# Altium PCB ST_Link-Wiki.PcbDoc
Units mm, origin at the board's own origin, x right, y up, seen from the top; angles counter-clockwise.
Board outline 32.77 x 33.27 mm, 2 copper layers (Top Layer, Bottom Layer), stack 1.571 mm thick; 49 components, 46 nets, 176 pads, 43 vias.
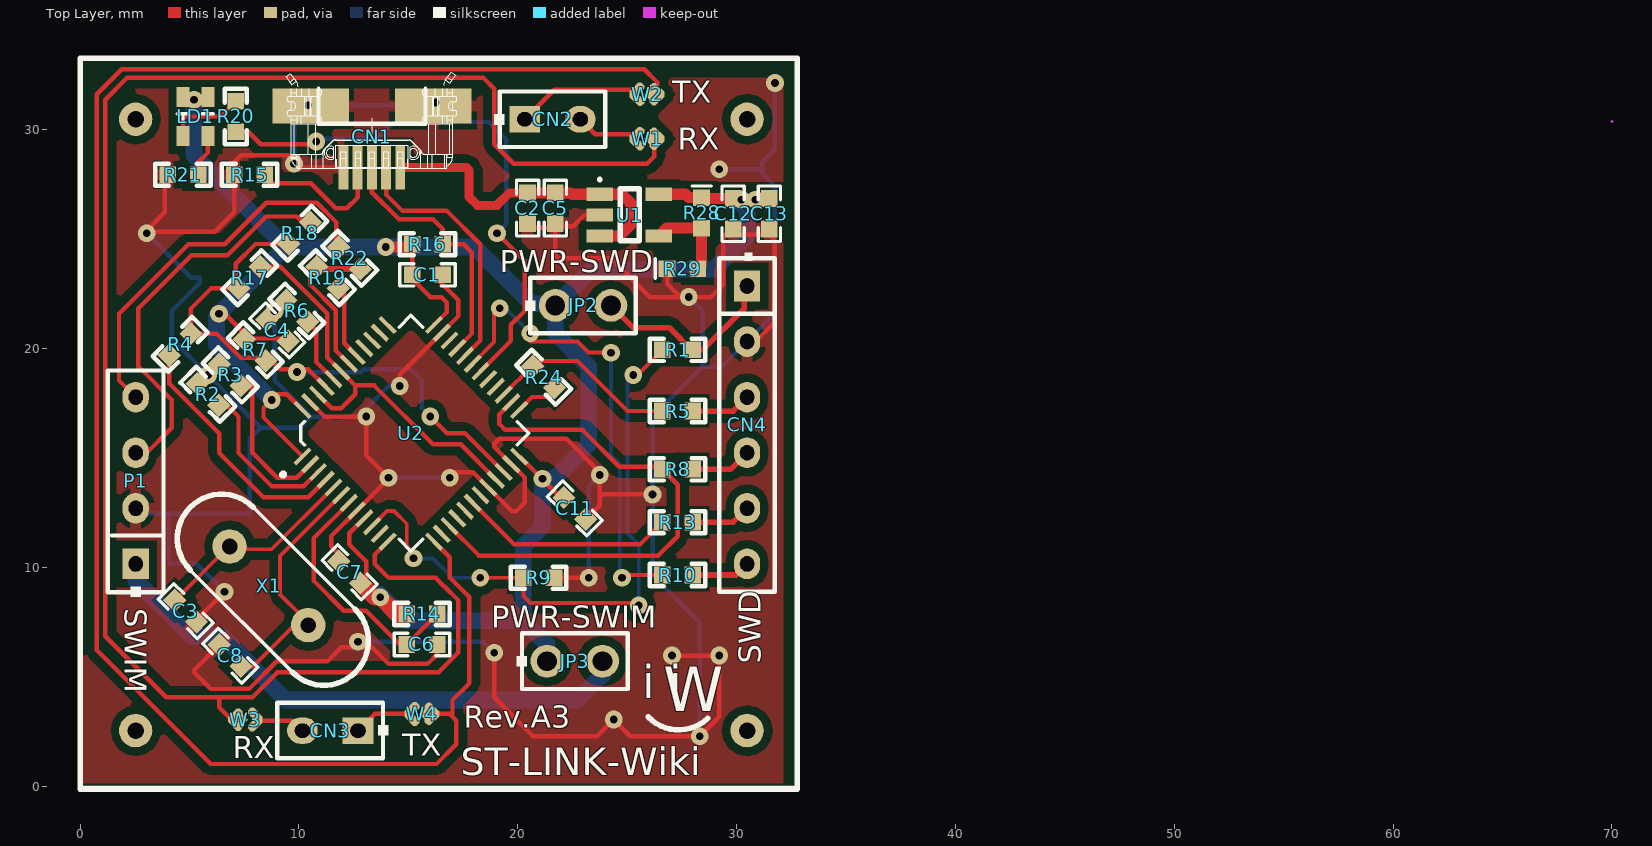
[diagram p0: Top Layer view]
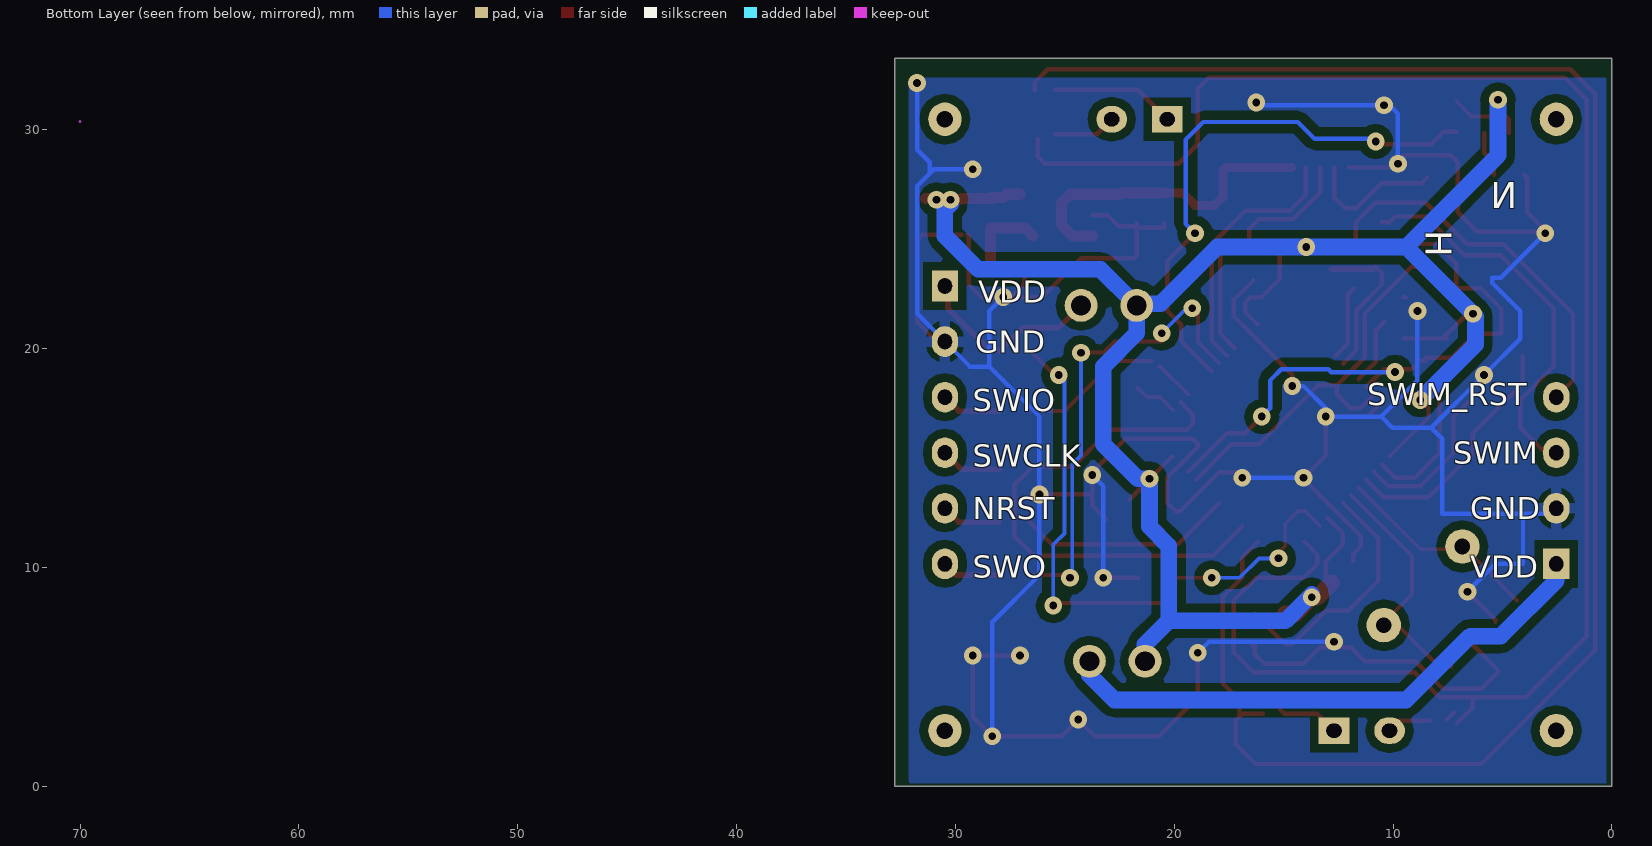
[diagram p1: Bottom Layer view, seen from below]

## Layer stack, top to bottom
Top Solder: solder mask 0.0102, Solder Resist, Dk 3.5
Top Layer: signal copper 0.0356
Dielectric1: core 1.5, FR-4, Dk 4.8
Bottom Layer: signal copper 0.0356
Bottom Solder: solder mask 0.0102, Solder Resist, Dk 3.5

## Board outline
0,33.274 0,0 32.766,0 32.766,33.274

## Design rules (kind name [scope] priority, off if disabled: settings)
Clearance Clearance_1 [(InPoly)] p1: gap=0.381
Clearance [All] p2: gap=0.178
FabricationTestPointUsage TestPointUsage [All] p1: valid=0 allowmultiple=FALSE
FabricationTestpoint Testpoint [(IsPad And (OnTopLayer Or OnBottomLayer))] p1: side=3 testpointundercomponent=TRUE minsize=1.016 maxsize=2.54 preferedsize=1.524 minholesize=0 maxholesize=1.016 preferedholesize=0.813 testpointgrid=0.025 allowsidetop=TRUE allowsidebottom=TRUE usegrid=TRUE gridtolerance=0
HoleSize [All] p1: absolutevalues=TRUE maxlimit=3.81 minlimit=0.025 maxpercent=80.000 minpercent=20.000
PolygonConnect PolygonConnect_1 [IsVia] p1: connectstyle=Direct reliefconductorwidth=0.508 reliefentries=4 polygonreliefangle="90 Angle" airgapwidth=0.254
PolygonConnect [All] p2: connectstyle=Relief reliefconductorwidth=0.508 reliefentries=4 polygonreliefangle="90 Angle" airgapwidth=0.254
RoomDefinition ST_LINK-Wiki [InComponentClass('ST_LINK-Wiki')] p1: confinementstyle=ConfineIn formatcopy=TRUE lockcomponents=FALSE outline -0.254,-0.127 32.766,-0.127 32.766,33.274 -0.254,33.274
RoutingLayers [All] p1: top layer_v5=FALSE bottom layer_v5=FALSE
RoutingVias [All] p1: holewidth=0.33 width=0.635 viastyle="Through Hole" minholewidth=0.203 minwidth=0.406 maxholewidth=0.711 maxwidth=1.27
SilkToSolderMaskClearance SilkscreenOverComponentPads [IsPad] p1: minsilkscreentomaskgap=0.254 clearancetoexposedcopper=TRUE
SolderMaskExpansion [All] p1: expansion=0.102
UnpouredPolygon [All] p1: allowunpoured=FALSE
Width Width_1 [InNet('VDD_MCU')] p1: maxlimit=2.54 minlimit=0.152 preferedwidth=0.305
Width [All] p2: maxlimit=2.54 minlimit=0.178 preferedwidth=0.203 minimp=50.000000 maximp=50.000000 favimp=50.000000
24 further rules are at their usual default settings.

## Components (designator, comment, footprint, x,y, rotation, side; value= is the part's Value field where it differs from the comment)
C1 "100nF" 0603C 15.875,23.368 r0 top (schematic designator C7)
C2 "1uF_X5R_0603" 0603C 20.447,26.416 r270 top (schematic designator C9)
C3 "20pF" 0603C 4.826,8.001 r135 top (schematic designator C2)
C4 "100nF" 0603C 9.017,20.828 r135 top (schematic designator C6)
C5 "100nF" 0603C 21.717,26.416 r270 top (schematic designator C11)
C6 "100nF" 0603C 15.621,6.477 r0 top (schematic designator C4)
C7 "100nF" 0603C 12.319,9.779 r135 top (schematic designator C8)
C8 "20pF" 0603C 6.858,5.969 r315 top (schematic designator C1)
C11 "100nF" 0603C 22.606,12.7 r315 top (schematic designator C5)
C12 "100nF" 0603C 29.845,26.162 r270 top (schematic designator C13)
C13 "1uF_X5R_0603" 0603C 31.496,26.162 r90 top (schematic designator C10)
CN1 "USB-Micro" USB-MICRO-Lite 13.335,30.988 r0 top (schematic designator CN3)
CN2 "" HDR1X2-L/2.54MM 20.32,30.48 r0 top
CN3 "" HDR1X2-L/2.54MM 12.7,2.54 r180 top
CN4 "Header 6X1" HDR1X6-L/2.54MM 30.48,22.86 r270 top (schematic designator CN1)
JP2 "" HDR1X2/2.54mm 21.717,21.971 r0 top
JP3 "" HDR1X2/2.54mm 21.336,5.715 r0 top
LD1 "LTST-C195KGJRKT" 0805-LED-Bi 5.207,29.591 r90 top
P1 "Header 4" HDR1X4-L/2.54MM 2.54,10.16 r90 top
R1 "4.7K" 0603R 27.305,19.939 r180 top (schematic designator R5)
R2 "10K[N/A]" 0603R 5.842,17.907 r135 top (schematic designator R6)
R3 "10K" 0603R 6.858,18.796 r135 top (schematic designator R4)
R4 "NC" 0603R 4.572,20.193 r45 top
R5 "22" 0603R 27.305,17.145 r0 top (schematic designator R8)
R6 "100K" 0603R 9.906,21.717 r135 top (schematic designator R3)
R7 "680" 0603R 8.001,19.939 r315 top
R8 "22" 0603R 27.305,14.478 r0 top (schematic designator R9)
R9 "4.7K" 0603R 20.955,9.525 r180 top (schematic designator R7)
R10 "22" 0603R 27.305,9.652 r0 top
R13 "22" 0603R 27.305,12.065 r0 top (schematic designator R10)
R14 "100K" 0603R 15.621,7.874 r0 top (schematic designator R12)
R15 "100K" 0603R 7.747,27.94 r0 top (schematic designator R26)
R16 "1K5" 0603R 15.875,24.765 r0 top (schematic designator R23)
R17 "220" 0603R 7.747,23.241 r45 top
R18 "220" 0603R 10.033,25.273 r225 top
R19 "220" 0603R 11.303,23.241 r315 top
R20 "100" 0603R 7.112,30.607 r270 top (schematic designator R18)
R21 "100" 0603R 4.699,27.94 r180 top (schematic designator R17)
R22 "220" 0603R 12.319,24.13 r315 top
R24 "100" 0603R 21.184,18.694 r315 top (schematic designator R16)
R28 "NC" 0603M 28.397,26.899 r270 top
R29 "NC" 0603M 26.822,23.647 r0 top
U1 "LDO" SOT23-5 23.749,27.051 r270 top (schematic designator U2)
U2 "STM32F103CBT6" "QFP48 7X7" 15.113,16.129 r315 top (schematic designator U1)
W1 "Jumper2-1" JP2_SMD 25.908,29.591 r0 top
W2 "Jumper2-1" JP2_SMD 25.908,31.623 r0 top
W3 "Jumper2-1" JP2_SMD 7.544,3.048 r180 top
W4 "Jumper2-1" JP2_SMD 15.621,3.302 r0 top
X1 "8MHz(12pF)" XTAL1 10.414,7.366 r135 top

## Footprints (in the part's own frame and the unit in brackets; to place one, negate y for a bottom-side part, rotate by r counter-clockwise, add the part's x,y. Pads: shape width x height; smd on the part's side, far side on the other; paste and mask are expansions set on the pad)
0603C [mil]
  rect 30x30 smd: 1(27.5,0) 2(-27.5,0)
  silkscreen extent -50,-20 50,20
0603M [mil]
  rect 30x30 smd: 1(0,0) 2(55,0)
  silkscreen extent -21,-17 -21,18, body extent -5,-15 60,15, height 43
0603R [mil]
  rect 30x30 smd: 1(27.5,0) 2(-27.5,0)
  silkscreen extent -50,-20 50,20
0805-LED-Bi [mm]
  rect 0.9x0.6 smd: 1(0.127,-0.635) 2(0.127,0.508) 3(1.905,0.508) 4(1.905,-0.635)
  silkscreen extent 0.76,-0.89 1.14,0.76, body extent 0.32,-1.02 1.72,0.9, height 1.1
HDR1X2-L/2.54MM [mm]
  rect 1.4x1.2 hole 0.65 slot 0.7 at 0 deg: 1(0,0)
  oval 1.4x1.2 hole 0.65 slot 0.7 at 0 deg: 2(2.54,0)
  silkscreen extent -1.4,-1.27 3.68,1.27
HDR1X2/2.54mm [mm]
  round 1.5 hole 0.9: 1(0,0) 2(2.54,0)
  silkscreen extent -1.4,-1.27 3.68,1.27
HDR1X4-L/2.54MM [mm]
  rect 1.4x1.2 hole 0.65 slot 0.7 at 0 deg: 1(0,0)
  oval 1.4x1.2 hole 0.65 slot 0.7 at 0 deg: 2(2.54,0) 3(5.08,0) 4(7.62,0)
  silkscreen extent -1.52,-1.27 8.84,1.27
HDR1X6-L/2.54MM [mm] "Connector; Header; 6 Position"
  rect 1.4x1.2 hole 0.65 slot 0.7 at 0 deg: 1(0,0)
  oval 1.4x1.2 hole 0.65 slot 0.7 at 0 deg: 2(2.54,0) 3(5.08,0) 4(7.62,0) 5(10.16,0) 6(12.7,0)
  silkscreen extent -1.52,-1.27 13.97,1.27
JP2_SMD [mil]
  oct 15x30 smd rot 45: 1(-18,-8) 2(18,7)
  oct 15.75x30 smd rot 135: 1(-18,8)
  rect 26x26 smd rot 45: 2(13,0)
  oct 15x30 smd rot 135: 2(18,-7)
"QFP48 7X7" [mm]
  rect 0.2x1 smd: 1(-2.75,-4.25) 2(-2.25,-4.25) 3(-1.75,-4.25) 4(-1.25,-4.25) 5(-0.75,-4.25) 6(-0.25,-4.25) 7(0.25,-4.25) 8(0.75,-4.25) 9(1.25,-4.25) 10(1.75,-4.25) 11(2.25,-4.25) 12(2.75,-4.25) 25(2.75,4.25) 26(2.25,4.25) 27(1.75,4.25) 28(1.25,4.25) 29(0.75,4.25) 30(0.25,4.25) 31(-0.25,4.25) 32(-0.75,4.25) 33(-1.25,4.25) 34(-1.75,4.25) 35(-2.25,4.25) 36(-2.75,4.25)
  rect 1x0.2 smd: 13(4.25,-2.75) 14(4.25,-2.25) 15(4.25,-1.75) 16(4.25,-1.25) 17(4.25,-0.75) 18(4.25,-0.25) 19(4.25,0.25) 20(4.25,0.75) 21(4.25,1.25) 22(4.25,1.75) 23(4.25,2.25) 24(4.25,2.75) 37(-4.25,2.75) 38(-4.25,2.25) 39(-4.25,1.75) 40(-4.25,1.25) 41(-4.25,0.75) 42(-4.25,0.25) 43(-4.25,-0.25) 44(-4.25,-0.75) 45(-4.25,-1.25) 46(-4.25,-1.75) 47(-4.25,-2.25) 48(-4.25,-2.75)
  silkscreen extent -3.81,-5.52 3.81,3.81
SOT23-5 [mm]
  rect 0.6x1.2 smd: 1(0,0) 2(0.95,0) 3(1.9,0) 4(1.9,2.7) 5(0,2.7)
  silkscreen extent -0.69,0 2.13,1.8, body extent -0.32,0.7 2.35,2.1, height 1.1
USB-MICRO-Lite [mm] "Connector; USB2.0, Type B, SM; 5 Position; Right Angle"
  rect 3.5x1.6 smd: 0(-2.802,0.088) 0(2.798,0.088)
  rect 0.45x2 smd: 1(1.298,-2.714) 2(0.648,-2.714) 3(-0.002,-2.714) 4(-0.652,-2.714) 5(-1.302,-2.714)
  silkscreen extent -3.92,-2.74 3.88,1.65
XTAL1 [mil]
  round 62 hole 28: 1(-0.36,-0.2) 2(199.64,-0.2)
  silkscreen extent -120,-80 300,80

## Part data
C1 C3 C4 C5 C6 C7 C8 C11 C12: library part Capacitor_ST, "Capacitor 0402 / 0603 / 0805"
C2 C13: library part "CAP SMD 0603  X5R 1µF 25V 10%", "0603  X5R 1µF"
CN2 CN3 JP2 JP3: library part JP2
CN4: "Header, 6-Pin, Single row"
LD1: "Avago, HSMF-A203 Bi-Color LED"
P1: "Header, 4-Pin"
R1 R2 R3 R4 R5 R6 R7 R8 R9 R10 R13 R14 R15 R16 R17 R18 R19 R20 R21 R22 R24: library part Resistor_ST, "Resistor 0402 / 0603 / 0805"
R28 R29: library part Res2, "Resistor"
U1: library part LDO-SOT23-5, "General LDO SOT23-5"
U2: "Medium-density performance line ARM-based 32-bit MCU with 64KB Flash"
W1 W2 W3 W4: "Jumper Wire"
X1: library part XTAL, "Crystal Oscillator"

## Free pads (board coordinates)
  round 1.524 hole 0.762: 2(2.54,2.54) 2(2.54,30.48) 2(30.48,2.54) 2(30.48,30.48)

## Via types
v1: diameter 0.813, hole 0.356, Top Layer to Bottom Layer, 43 vias

## Nets (pads, with @x,y where several pads share a name; then routed paths per layer and width w, separated by ;. In a path a pad name is that pad's centre, name@x,y a point inside that pad or via, vN(x,y) a via of type N, cw(c..) or ccw(c..) an arc to the next point about the centre after c; other vN are vias at no path point)
+3V3_ST_LINK: C1.2 C4.2 C7.2 C11.2 C12.2 C13.1 JP2.1 JP3.1 LD1.3 LD1.4 R7.2 R14.2 R16.2 R28.1 U1.5 U2.1 U2.9 U2.24 U2.36 U2.48 | length 96.9
  Top Layer w0.203: v1(6.35,21.59) 6.604,21.59 7.634,20.56 R7.2@7.662,20.588 ; R7.2@7.535,20.461 C4.2@9.511,20.461 ; U2.1 8.382,16.85 8.382,17.286 9.003,17.907 9.446,17.907 U2.48 ; U2.9 12.306,11.555 12.306,11.049 13.068,10.287 C7.2@13.068,9.538 ; R16.2@15.05,24.638 15.177,24.511 C1.2 15.177,23.178 16.002,22.352 16.51,22.352 16.764,22.098 16.764,21.669 U2.36 ; U2.24 20.085,15.068 C11.2@22.036,13.118 ; JP2.1 JP2.1@21.9,21.971
  Top Layer w0.508: v1(13.97,24.638) R16.2@15.05,24.638 ; 27.055,27.051 27.661,27.051 27.813,26.899 R28.1 R28.1@28.435,26.861 ; R28.1@28.308,26.861 29.718,26.861 29.997,26.721 v1(30.226,26.797) ; v1@30.861,26.861 C13.1@31.369,26.861
  Top Layer w0.762: C7.2 13.462,8.636 v1(13.716,8.636) 14.478,7.874 R14.2
  Bottom Layer w0.762: v1(5.207,31.369) 5.207,28.829 9.398,24.638 ; v1(8.763,17.653) 6.237,20.179 6.237,21.477 v1(6.35,21.59) 9.398,24.638 ; v1@13.716,8.763 v1(13.716,8.636) 13.843,8.636 14.923,7.557 20.257,7.557 ; JP3.1@21.336,5.461 21.336,6.477 20.257,7.557 ; JP2.1 21.717,20.701 23.241,19.177 23.241,15.621 21.666,14.046 v1(21.133,14.046) 21.133,11.862 20.257,10.986 20.257,7.557 ; v1@30.226,26.607 30.48,26.353 30.48,25.146 28.956,23.622 23.368,23.622 21.793,22.047 20.625,22.047 18.034,24.638 v1(13.97,24.638) 10.795,24.638 9.398,24.638
  other v1: 30.861,26.797
AIN_1: R1.1 R9.1 U2.10 | length 28.5
  Top Layer w0.178: U2.10 14.032,12.573 14.351,12.573 14.93,11.994 14.93,10.978 v1@15.494,10.414 ; v1(18.288,9.525) R9.1 20.257,8.699 20.574,8.382 25.4,8.382 v1(25.527,8.255) v1@25.337,8.065 ; v1(25.273,18.796) 25.464,18.796 R1.1
  Bottom Layer w0.178: v1(15.24,10.414) 16.129,10.414 17.018,9.525 v1(18.288,9.525) ; v1(25.273,18.796) 25.019,18.542 25.019,11.557 25.527,11.049 v1(25.527,8.255)
GND: C1.1 C2.1 C3.2 C4.1 C5.1 C6.1 C7.1 C8.2 C11.1 C12.1 C13.2 CN1.0 CN1.5 CN4.2 P1.2 R2.1 R3.1 R6.1 R9.2 R15.2 R21.1 R29.1 U1.2 U2.8 U2.20 U2.23 U2.35 U2.47 | length 216
  Top Layer w0.203: R21.1 3.874,27.813 3.874,26.225 2.985,25.336 6.159,25.336 7.049,26.226 R15.2@7.049,27.813 ; 5.207,5.207 5.969,4.445 7.716,4.445 8.986,5.715 11.303,5.715 11.938,6.35 13.335,6.35 14.097,5.588 15.875,5.588 16.32,6.033 C6.1 ; 5.207,5.306 C8.2 ; C3.2 5.32,7.606 v1(6.604,8.89) ; R15.2 7.049,28.512 7.366,28.829 9.525,28.829 10.08,28.274 CN1.5 ; R6.1@9.412,22.338 R6.1@9.539,22.338 ; U2.47 11.169,16.891 v1(13.081,16.891) 13.081,15.113 v1(14.097,14.097) 14.097,14.052 U2.8 11.469,11.425 11.469,10.972 11.825,10.617 C7.1 ; v1(14.605,18.288) 14.605,18.803 U2.35 17.272,21.47 17.272,22.225 C1.1@16.383,23.114 ; C6.1@16.447,6.414 C6.1@16.447,6.477 ; v1@17.018,14.351 17.952,14.351 U2.20 19.73,12.573 19.939,12.573 20.32,12.954 20.32,14.104 U2.23 18.923,15.501 18.923,15.646 19.152,15.875 22.225,15.875 23.749,14.351 23.749,13.208 ; v1(18.923,6.096) 18.923,4.064 20.701,2.286 23.622,2.286 v1(24.384,3.048) 25.146,2.286 v1(28.321,2.286) 29.21,3.175 v1(29.21,5.969) v1(27.051,5.969) ; C2.1 20.447,25.527 C5.1@21.717,25.527 ; R9.2 v1(23.241,9.525) ; C5.1 C5.1@21.717,25.591 ; C11.1 23.128,12.206 23.749,12.827 23.749,13.208 ; U1.2 23.053,26.101 22.543,25.591 C5.1@21.717,25.591 ; v1(26.162,13.335) 23.876,13.335 23.749,13.208 ; R29.1 26.822,22.962 v1@27.432,22.352 ; v1@29.083,28.067 29.21,27.94 v1(29.21,28.194) ; C12.1@29.464,25.21 29.401,25.146 29.401,22.924 28.829,22.352 v1(27.813,22.352) v1@27.432,22.352 ; C12.1@29.718,25.21 C13.2@31.369,25.21 ; CN4.2 30.861,20.32 31.75,21.209 31.75,24.956 C13.2@31.496,25.21 ; C5.1@21.717,25.527 C5.1@21.717,25.591 ; C5.1@21.717,25.527 21.717,24.257 21.844,24.13 24.257,24.13 26.035,22.352 v1@27.432,22.352
  Bottom Layer w0.203: P1.2 2.794,12.446 3.937,12.446 ; v1(3.048,25.273) 5.08,23.241 5.461,23.241 5.461,22.987 4.191,21.717 4.191,20.447 v1(5.842,18.796) 8.255,16.383 ; v1(6.604,8.89) 5.334,10.16 4.064,10.16 4.064,12.319 3.937,12.446 ; v1(8.89,21.717) 8.89,18.542 10.541,16.891 ; v1(9.779,28.448) 9.779,30.734 10.16,31.115 v1(10.414,31.115) 16.129,31.115 v1(16.256,31.242) ; v1(12.7,6.604) 18.415,6.604 v1(18.923,6.096) ; v1(14.097,14.097) v1(16.891,14.097) ; v1(14.605,18.288) 14.097,18.288 13.081,17.272 v1(13.081,16.891) 10.541,16.891 ; v1(23.241,9.525) 23.241,13.716 v1(23.749,14.224) ; v1(27.813,22.352) 28.448,21.717 28.448,19.177 ; v1(28.321,2.286) 28.321,7.493 26.162,9.652 v1(26.162,13.335) 26.162,16.891 28.448,19.177 ; v1(29.21,28.194) 30.988,28.194 31.178,28.003 ; v1(31.75,32.131) 31.75,29.083 31.178,28.511 31.178,28.003 ; 3.937,12.446 7.747,12.446 7.747,15.875 8.255,16.383 ; 8.255,16.383 10.033,16.383 10.541,16.891 ; 28.448,19.177 29.337,19.177 CN4.2 31.75,21.59 31.75,27.432 31.178,28.003
LED_STLINK: R20.1 U2.30 | length 25.5
  Top Layer w0.203: R20.1 7.683,29.909 8.255,29.337 10.668,29.337 v1(10.795,29.464) ; U2.30 19.685,20.347 19.685,21.082 20.32,21.717 20.32,24.003 v1(19.05,25.273)
  Bottom Layer w0.203: v1(10.795,29.464) 10.922,29.591 13.589,29.591 14.351,30.353 18.669,30.353 19.482,29.54 19.482,25.705 v1(19.05,25.273)
NetCN1_4: CN1.4 R15.1 | length 6.4
  Top Layer w0.203: R15.1@8.445,27.813 8.699,27.559 10.541,27.559 11.684,26.416 12.192,26.416 12.683,26.907 CN1.4
NetCN2_1: CN2.1 W2.1 | length 5.7
  Top Layer w0.203: CN2.1 21.666,31.826 W2.1@25.451,31.826
NetCN2_2: CN2.2 W1.1 | length 2.9
  Top Layer w0.203: CN2.2 23.546,29.794 W1.1@25.451,29.794
NetCN3_1: CN3.1 W4.1 | length 2.9
  Top Layer w0.203: CN3.1 13.462,3.302 14.961,3.302 W4.1@15.164,3.505
NetCN3_2: CN3.2 W3.1 | length 2
  Top Layer w0.203: W3.1@8.331,2.997 9.703,2.997 CN3.2
NetCN4_1: CN4.1 JP2.2 R1.2 | length 8.8
  Top Layer w0.254: JP2.2 25.273,20.955 26.924,20.955 R1.2@28.004,19.876 ; R1.2 28.448,19.939 30.353,21.844 30.353,22.733 CN4.1
NetCN4_3: CN4.3 R5.1 | length 2.7
  Top Layer w0.254: R5.1 29.845,17.145 CN4.3
NetCN4_4: CN4.4 R8.1 | length 2.8
  Top Layer w0.254: R8.1 29.718,14.478 CN4.4
NetCN4_5: CN4.5 R13.1 | length 2.7
  Top Layer w0.254: R13.1 29.845,12.065 CN4.5
NetCN4_6: CN4.6 R10.1 | length 2.7
  Top Layer w0.254: R10.1 29.972,9.652 CN4.6
NetJP3_2: JP3.2 P1.1 | length 25.6
  Bottom Layer w0.762: P1.1 2.54,9.398 5.08,6.858 6.477,6.858 9.398,3.937 22.733,3.937 23.876,5.08 JP3.2 ; JP3.2@23.812,5.715 23.812,5.779 JP3.2@23.876,5.842
NetLD1_1: LD1.1 R21.2 | length 2.1
  Top Layer w0.203: R21.2 5.397,28.511 5.842,28.956 LD1.1@5.842,29.845
NetLD1_2: LD1.2 R20.2 | length 3.4
  Top Layer w0.178: LD1.2@4.699,29.845 4.699,30.48 4.826,30.607 6.413,30.607 R20.2
NetP1_3: P1.3 R18.2 | length 17.6
  Top Layer w0.203: P1.3@2.921,15.113 4.191,16.383 4.191,17.653 2.667,19.177 2.667,21.844 5.08,24.257 6.731,24.257 8.509,26.035 9.906,26.035 10.174,25.767 R18.2
NetP1_4: P1.4 R22.2 | length 17.9
  Top Layer w0.203: P1.4 1.778,18.542 1.778,21.59 4.953,24.765 6.604,24.765 8.509,26.67 10.809,26.67 11.698,25.781 R22.2@11.698,24.497 ; P1.4@2.794,18.034 P1.4@2.921,18.034
NetR2_2: R2.2 U2.3 | length 7.1
  Top Layer w0.203: R2.2@6.59,17.54 7.239,16.891 7.239,15.228 8.751,13.716 10.225,13.716 U2.3
NetR3_2: R3.2 U2.2 | length 6.8
  Top Layer w0.203: R3.2@7.606,18.556 7.874,18.288 7.874,15.24 9.011,14.103 9.905,14.103 U2.2
NetR6_2: R6.2 U2.44 | length 3.1
  Top Layer w0.203: R6.2 10.795,20.828 10.795,19.386 U2.44
NetR28_2: R28.2 R29.2 U1.4 | length 4
  Top Layer w0.508: U1.4 26.8,25.502 R28.2 28.397,23.825 R29.2
OSC_IN: C3.1 U2.5 X1.2 | length 9.7
  Top Layer w0.178: C3.1 X1.2@6.665,10.828 ; X1.2@6.832,11.082 6.832,10.995 X1.2@6.665,10.828 ; U2.5 8.751,10.828 X1.2@6.665,10.828
OSC_OUT: C8.1 U2.6 X1.1 | length 10.9
  Top Layer w0.178: C8.1 7.901,5.475 10.167,7.741 10.167,7.747 9.144,8.77 9.144,10.514 U2.6
STLINK_RX: U2.13 W2.2 W4.2 | length 82.5
  Top Layer w0.203: W4.2@15.951,3.302 16.891,3.302 17.018,3.175 ; U2.13 16.891,10.462 16.891,9.538 17.78,8.649 17.78,4.699 17.018,3.937 17.018,3.175 ; W2.2@26.365,31.801 26.365,32.182 25.781,32.766 1.905,32.766 0.762,31.623 0.762,6.223 5.969,1.016 16.287,1.016 17.196,1.925 17.196,2.997 17.018,3.175
STLINK_TX: U2.12 W1.2 W3.2 | length 82.3
  Top Layer w0.203: W3.2@7.087,2.87 6.35,3.607 6.35,4.064 ; W3.2@7.226,3.365 W3.2@7.544,3.048 ; U2.12 13.462,10.589 13.462,10.16 14.097,9.525 16.243,9.525 16.624,9.144 16.637,9.144 17.272,8.509 17.272,6.096 16.383,5.207 9.017,5.207 7.874,4.064 6.35,4.064 ; W1.2@26.238,29.591 26.238,28.778 25.908,28.448 19.812,28.448 18.923,29.337 18.923,31.877 18.415,32.385 2.159,32.385 1.143,31.369 1.143,6.858 3.937,4.064 6.35,4.064
STM_JTCK: U2.37
STM_JTMS: U2.34
STM_RST: C6.2 R14.1 U2.7 | length 11.7
  Top Layer w0.203: U2.7 10.668,11.33 10.668,9.398 12.045,8.021 13.061,8.021 14.605,6.477 C6.2 R14.1
SWIM: R4.1 R7.1 R17.2 R18.1 U2.22 U2.45 | length 27
  Top Layer w0.203: R7.1 8.749,19.445 9.144,19.05 10.414,19.05 10.419,19.055 U2.45 ; R7.1@8.495,19.572 7.352,19.572 6.237,20.687 R4.1 5.066,21.83 5.983,22.747 R17.2 7.112,22.888 7.112,23.876 8.015,24.779 R18.1 ; v1(16.002,16.891) 16.764,16.129 17.588,16.129 U2.22
  Bottom Layer w0.203: v1(9.906,18.923) 12.827,18.923 12.954,19.05 15.113,19.05 15.621,18.542 15.621,17.272 v1(16.002,16.891)
SWIM_IN: R17.1 U2.21 U2.43 U2.46 | length 18.6
  Top Layer w0.203: R17.1 9.158,23.735 11.303,21.59 11.303,19.585 U2.43 12.573,18.315 ; U2.46 11.495,17.272 11.938,17.272 12.573,17.907 12.573,18.315 ; U2.21 17.389,15.621 16.129,15.621 13.435,18.315 12.573,18.315
SWIM_PU: R4.2 U2.4 | length 11.4
  Top Layer w0.203: R4.2 4.078,18.401 6.35,16.129 6.35,15.24 8.385,13.205 10.421,13.205 U2.4
SWIM_RST: R19.2 R22.1 U2.42 | length 7.2
  Top Layer w0.203: R19.2 10.527,23.453 10.527,22.905 11.684,21.748 11.684,19.912 U2.42
  Top Layer w0.254: R19.2@10.908,23.636 R22.1
SWIM_RST_IN: R19.1 U2.41 | length 3.4
  Top Layer w0.203: R19.1 12.065,22.479 12.065,20.238 U2.41
T_JTCK: R8.2 U2.15 U2.26 | length 24.2
  Top Layer w0.203: U2.15 18.226,10.541 26.416,10.541 27.305,11.43 27.305,13.78 R8.2 ; U2.26 19.164,16.998 19.164,16.549 19.431,16.281 22.962,16.281 24.638,14.605 R8.2@26.607,14.605
T_JTDI: U2.17
T_JTDO: U2.16
T_JTMS: R5.2 R24.2 U2.27 | length 8.4
  Top Layer w0.178: U2.27 20.647,19.188 R24.2 ; 21.04,19.431 22.733,19.431 25.019,17.145 R5.2
T_NRST: R13.2 U2.18 | length 9.9
  Top Layer w0.203: U2.18 19.839,11.049 25.591,11.049 R13.2
T_SWDIO_IN: R24.1 U2.25 | length 2
  Top Layer w0.178: U2.25 20.653,17.78 21.257,17.78 R24.1
T_SWO: R10.2 U2.31 | length 21.8
  Top Layer w0.178: U2.31 18.923,20.293 18.923,21.59 v1(19.177,21.844) ; v1@20.32,20.574 20.574,20.32 22.733,20.32 23.241,19.812 v1(24.257,19.812) ; v1@24.511,9.652 R10.2
  Bottom Layer w0.178: v1(19.177,21.844) 19.431,21.844 v1(20.574,20.701) ; v1(24.257,19.812) 24.257,15.113 24.663,14.707 24.663,9.627 v1(24.765,9.525)
U5V: C2.2 C5.2 CN1.1 U1.1 U1.3 | length 15
  Top Layer w0.406: CN1.1 17.653,28.274 17.78,28.147 17.78,26.924 18.161,26.543 19.05,26.543 19.622,27.115 C2.2
  Top Layer w0.508: C2.2 C5.2 22.416,27.115 22.479,27.051 U1.1 24.765,27.051 25.146,26.67 25.146,25.654 24.643,25.151 U1.3
USB_DM: CN1.2 U2.32 | length 11.9
  Top Layer w0.203: CN1.2 13.983,27.038 14.732,26.289 16.764,26.289 18.288,24.765 18.288,20.365 U2.32
USB_DP: CN1.3 R16.1 U2.33 | length 11.8
  Top Layer w0.203: CN1.3 13.333,27.149 14.574,25.908 16.129,25.908 16.574,25.463 R16.1 ; R16.1@16.764,24.638 16.891,24.765 17.526,24.765 17.907,24.384 17.907,20.691 U2.33
USB_RENUMN: U2.38
pads on no net: U2.11 U2.14 U2.19 U2.28 U2.29 U2.39 U2.40

## Polygon pours and split planes (outlines as drawn)
GND on Bottom Layer "Top Layer-GND" (solid, remove dead copper, pour order 6): 32.258,0.127 32.131,0.254 32.131,32.385 0.254,32.385 0.254,0.127
GND on Bottom Layer "Top Layer-GND" (solid, remove dead copper, pour order 4): 0.381,32.258 0.508,32.385 31.877,32.385 31.877,0.381 31.75,0.254 0.381,0.254
GND on Bottom Layer "Top Layer-GND" (solid, remove dead copper, pour order 14): 0.381,32.385 31.877,32.385 31.877,0.632 31.75,0.507 31.623,0.381 0.381,0.381
GND on Top Layer "Top Layer-GND" (solid, remove dead copper, pour order 8): 32.131,32.385 0.127,32.385 0.127,0.127 32.131,0.127
GND on Top Layer "Top Layer-GND" (solid, remove dead copper, pour order 2): 0.381,32.385 32.004,32.385 32.004,0.254 0.381,0.254
GND on Top Layer "Top Layer-GND" (solid, remove dead copper, pour order 12): 0.756,32.385 0.508,32.136 0.508,0.508 31.753,0.508 31.877,0.633 31.877,32.385

## Keep-outs
Keep-Out Layer:
  lines w0.127: 70,30.375 70,30.375

## Silkscreen, mask and mechanical layers (free items; w line width, h text height)
Top Overlay:
  lines w0.254: 25.959,3.175 ccw(c27.356,4.496) 28.677,3.099 ; 0,-0.127 0,33.274 32.766,33.274 32.766,-0.127 0,-0.127
  text "TX" at 27.051,31.242 h1.02
  text "RX" at 27.305,29.083 h1.02
  text "PWR-SWD" at 19.177,23.495 h1.02
  text "SWIM" at 2.032,8.128 h1.02 r270
  text "PWR-SWIM" at 18.796,7.239 h1.02
  text "SWD" at 31.115,5.588 h1.02 r90
  text "i i" at 25.679,4.013 h1.52
  text "W" at 26.645,3.429 h2.03
  text "Rev.A3" at 17.526,2.667 h1
  text "TX" at 14.732,1.397 h1.02
  text "RX" at 6.985,1.27 h1.02
  text "ST-LINK-Wiki" at 17.399,0.508 h1.27
Bottom Overlay:
  text "N" at 4.318,26.035 h2.03
  text "H" at 8.89,25.4 h2.03 r90
  text "VDD" at 28.956,22.098 h1.02
  text "GND" at 29.083,19.812 h1.02
  text "SWIM_RST" at 11.176,17.399 h1.02
  text "SWIO" at 29.21,17.145 h1.02
  text "SWIM" at 7.239,14.732 h1.02
  text "SWCLK" at 29.21,14.605 h1.02
  text "GND" at 6.477,12.192 h1.02
  text "NRST" at 29.21,12.192 h1.02
  text "VDD" at 6.477,9.525 h1.02
  text "SWO" at 29.21,9.525 h1.02